# EAGLE board ME433Schematic (EAGLE 7.5.0)
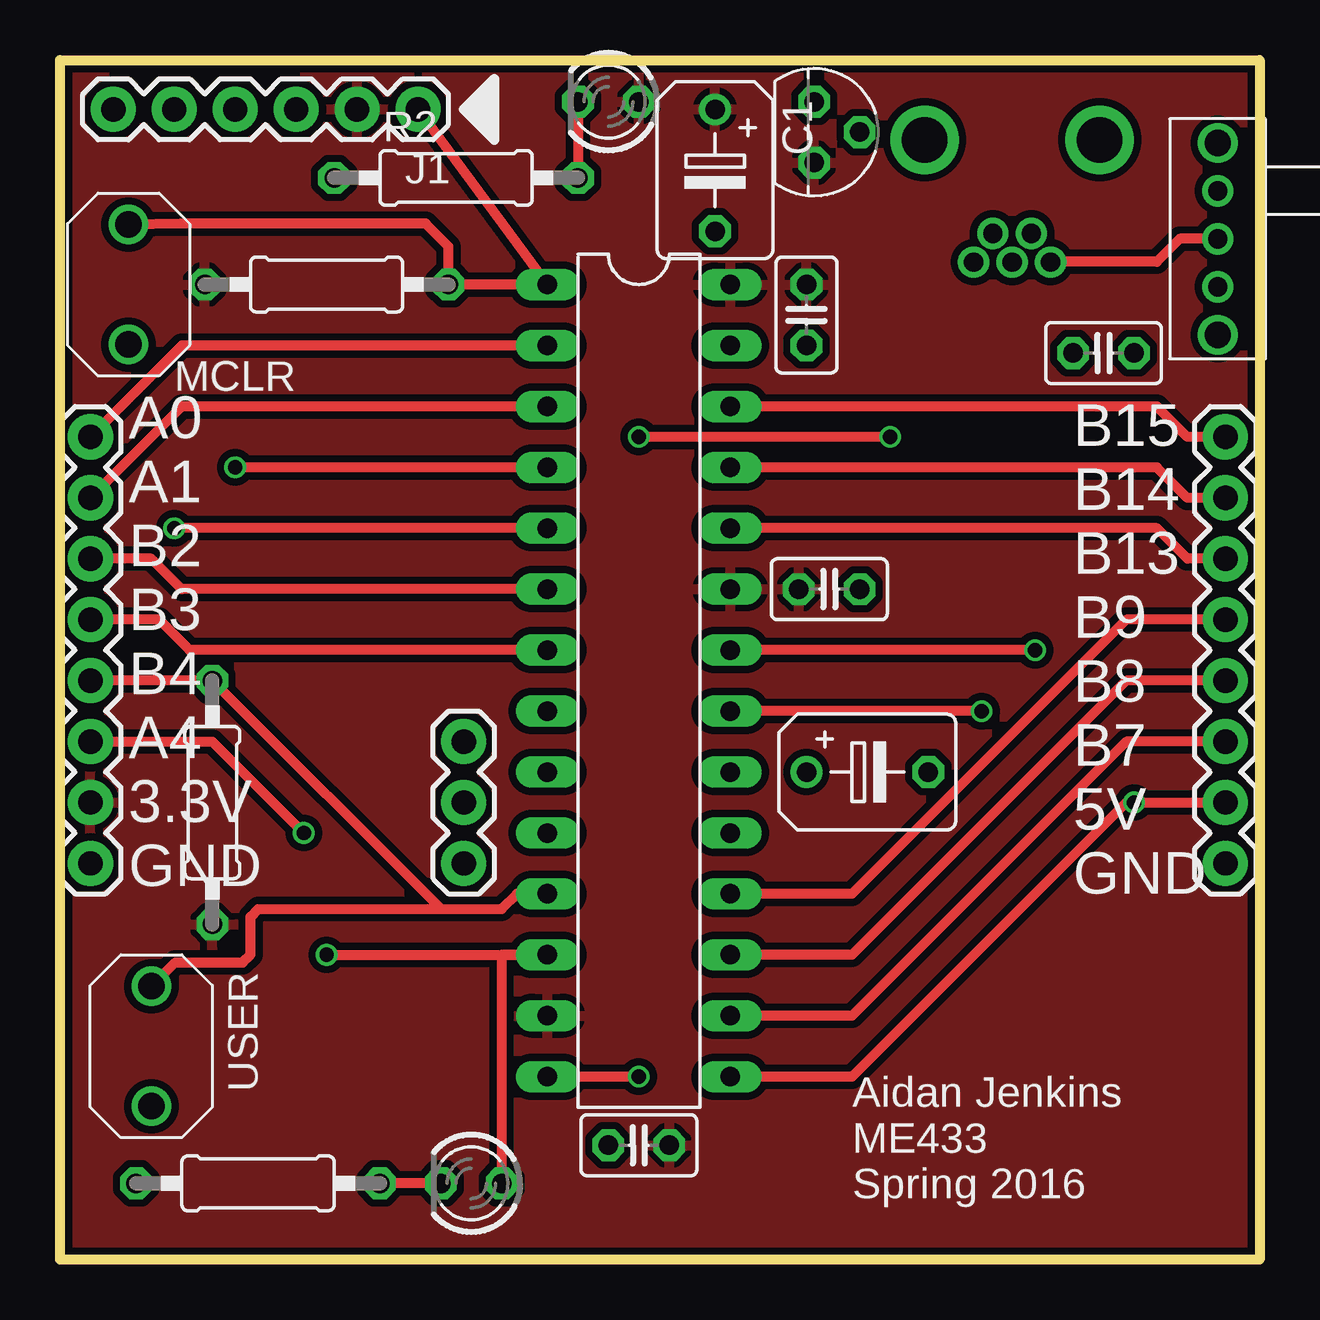
[diagram p0: board, top side]
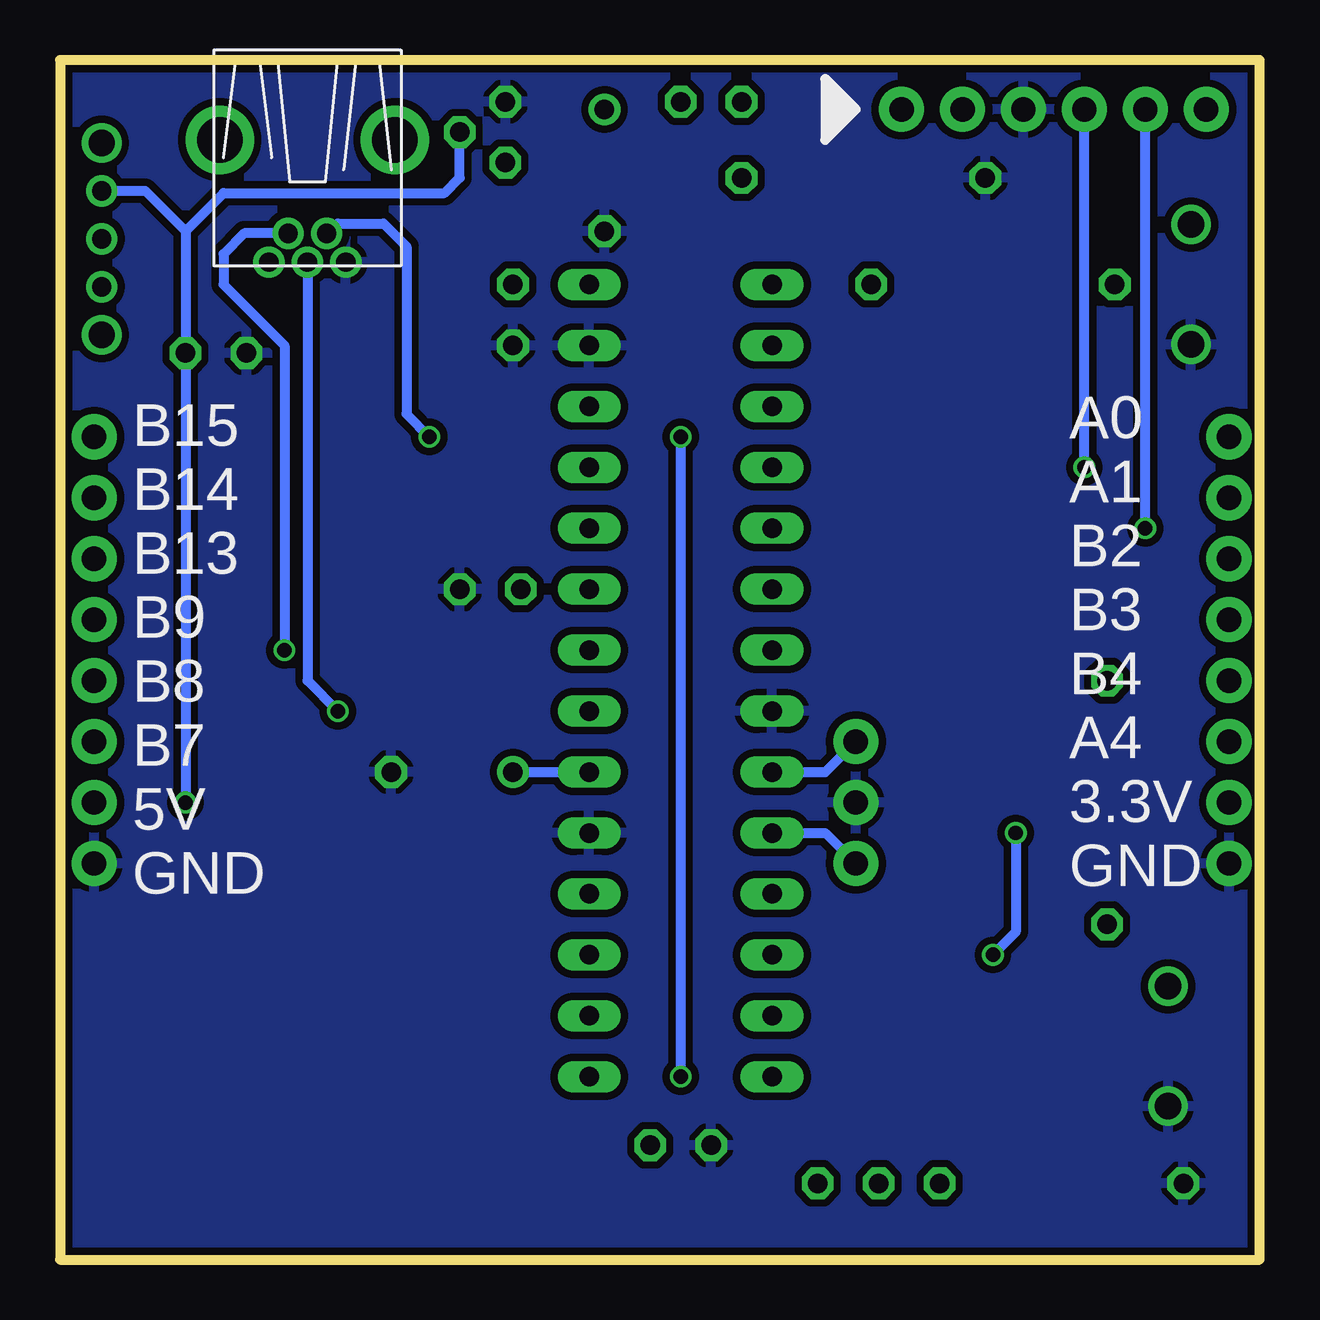
[diagram p1: board, bottom side, seen from below]

Size 50 x 50 mm. Coordinates in mm from the lower left corner, seen from the top.
Outline: 0,0 0,50 50,50 50,0 0,0
Copper layers (1*16): Top 0.035mm / dielectric 1.5mm / Bottom 0.035mm
Design rules "SeeedStudio_2layer_DRU_no_angle_20140221": minimum track width 6mil, minimum drill 12mil, track to track 6mil, track to pad 6mil, pad to pad 6mil, via to via 6mil, smd to smd 0mil, copper to edge 10mil, drill to drill 10mil, minimum pad ring 10mil, minimum via ring 6mil, stop-mask expansion 2mil, vias tented up to drill 100mil, thermal gap 10mil

## Footprints (pad centres in the part's own frame; a part is rotated, then mirrored left to right if it is on the bottom)
B45181B = drill 0.813: + -2.54,0 | drill 0.813 octagon: - 2.54,0
C025-025X050 = drill 0.813 octagon: 1 -1.27,0; 2 1.27,0
1X06 = drill 1.016 pad 1.88: 1 0,0; 2 2.54,0; 3 5.08,0; 4 7.62,0; 5 10.16,0; 6 12.7,0
1X08_ROUND = drill 1.016 pad 1.88: 1 0,0; 2 2.54,0; 3 5.08,0; 4 7.62,0; 5 10.16,0; 6 12.7,0; 7 15.24,0; 8 17.78,0
LED3MM = drill 0.813 octagon: A -1.27,0; K 1.27,0
0207/10 = drill 0.813 octagon: 1 -5.08,0; 2 5.08,0
DIL28-3 = drill 0.813 long: 1 -16.51,-3.81; 2 -13.97,-3.81; 3 -11.43,-3.81; 4 -8.89,-3.81; 5 -6.35,-3.81; 6 -3.81,-3.81; 7 -1.27,-3.81; 8 1.27,-3.81; 9 3.81,-3.81; 10 6.35,-3.81; 11 8.89,-3.81; 12 11.43,-3.81; 13 13.97,-3.81; 14 16.51,-3.81; 15 16.51,3.81; 16 13.97,3.81; 17 11.43,3.81; 18 8.89,3.81; 19 6.35,3.81; 20 3.81,3.81; 21 1.27,3.81; 22 -1.27,3.81; 23 -3.81,3.81; 24 -6.35,3.81; 25 -8.89,3.81; 26 -11.43,3.81; 27 -13.97,3.81; 28 -16.51,3.81
1X03 = drill 1.016 pad 1.88: 1 0,0; 2 2.54,0; 3 5.08,0
SWITCH = drill 1.1: P$1 -2.5,0; P$2 2.5,0
USB-MB-H = drill 0.8: D+ 5.1,0; D- 3.9,0.8; GND 5.1,-1.6; ID 3.9,-0.8; VBUS 5.1,1.6 | drill 1.9: P$6 0,-3.65; P$7 0,3.65
TO92 = drill 0.813 octagon: 1.GND -1.27,0; 2.VIN 0,1.905; 3.VOUT 1.27,0
SPDTSLIDE = drill 0.8: 1.OUT -2,0; 2.OUT 2,0; 3.COMMON 0,0 | drill 1.1: P$4 -4,0; P$5 4,0

## Placement (x,y rotation side)
C1  10uF  [B45181B]  27.3,45.4 270 top
C2  10uF  [B45181B]  33.66,20.32 0 top
C3  0.1uF  [C025-025X050]  24.13,4.76 180 top
C4  0.1uF  [C025-025X050]  31.11,39.37 270 top
C5  0.1uF  [C025-025X050]  32.07,27.94 0 top
C6  0.1uF  [C025-025X050]  43.5,37.78 180 top
J1  [1X06]  14.92,47.94 180 top
J2  [1X08_ROUND]  1.27,16.51 90 top
J3  [1X08_ROUND]  48.58,16.51 90 top
LED1  RED  [LED3MM]  22.86,48.26 180 top
LED2  GREEN  [LED3MM]  17.14,3.17 180 top
R1  10K  [0207/10]  11.11,40.64 0 top
R2  330  [0207/10]  16.51,45.09 0 top
R3  10K  [0207/10]  6.35,19.05 90 top
R4  330  [0207/10]  8.26,3.17 0 top
U$1  PIC32MX250F128B  [DIL28-3]  24.13,24.13 270 top
U$2  8MHZRESONATOR  [1X03]  16.83,16.51 90 top
U$3  MCLR  [SWITCH]  2.86,40.64 270 top
U$8  PUSHSWITCH  [SWITCH]  3.81,8.89 270 top
U$12  USBMINIB  [USB-MB-H]  39.69,46.67 270 top
U$13  MCP1702TO  [TO92]  31.43,46.99 270 top
U$18  SLIDESWITCH  [SPDTSLIDE]  48.26,42.55 270 top

## Library data of the parts
C1-C6 LED1 LED2 R1-R4 U$1-U$3 U$8 U$12 U$13 U$18 = ME433Library
J1-J3 = ME433Library; PROD_ID: CONN-08437

## Nets
+3V3: C1.+ C3.1 C4.1 C5.1 J1.2 J2.2 LED1.A R1.1 R3.1 U$1.13 U$1.23 U$1.28 U$13.3.VOUT
+5V: C6.1 J3.2 U$1.15 U$13.2.VIN U$18.1.OUT
A0: J2.8 U$1.2
A1: J2.7 U$1.3
A4: J2.3 LED2.A U$1.12
B2: J2.6 U$1.6
B3: J2.5 U$1.7
B4: J2.4 R3.2 U$1.11 U$8.P$1
B7: J3.3 U$1.16
B8: J3.4 U$1.17
B9: J3.5 U$1.18
B13: J3.6 U$1.24
B14: J3.7 U$1.25
B15: J3.8 U$1.26
D+: U$1.21 U$12.D+
D-: U$1.22 U$12.D-
GND: C1.- C2.- C3.2 C4.2 C5.2 C6.2 J1.3 J2.1 J3.1 R2.1 R4.1 U$1.8 U$1.19 U$1.27 U$2.2 U$3.P$2 U$8.P$2 U$12.GND U$13.1.GND
ID: U$1.14 U$12.ID
MCLR: J1.1 R1.2 U$1.1 U$3.P$1
N$1: U$12.VBUS U$18.3.COMMON
N$2: U$1.9 U$2.3
N$3: U$1.10 U$2.1
N$6: C2.+ U$1.20
N$7: LED2.K R4.2
N$11: LED1.K R2.2
PEGC1: J1.5 U$1.5
PEGD1: J1.4 U$1.4

## Tracks (layer width: path | path; a pad name or v marks a point on that pad's centre or on a via)
+3V3
  pour Top (isolate 0.305): -5.08,-2.54 -5.08,58.42 58.42,58.42 58.42,-2.54
+5V  (via drill 0.6)
  Top 0.406: J3.2 v44.77,19.05 44.45,19.05 33.02,7.62 U$1.15
  Bottom 0.406: U$18.1.OUT 46.45,44.55 44.77,42.86 | 44.77,42.86 C6.1 v44.77,19.05 | 44.77,42.86 43.18,44.45 33.97,44.45 33.34,45.09 U$13.2.VIN
A0
  Top 0.406: U$1.2 5.08,38.1 J2.8
A1
  Top 0.406: U$1.3 5.08,35.56 J2.7
A4  (via drill 0.6)
  Top 0.406: LED2.A 18.41,12.7 U$1.12 v11.11,12.7 | J2.3 6.35,21.59 v10.16,17.78
  Bottom 0.406: v10.16,17.78 10.16,13.65 v11.11,12.7
B2
  Top 0.406: U$1.6 5.08,27.94 3.81,29.21 J2.6
B3
  Top 0.406: U$1.7 5.4,25.4 4.13,26.67 J2.5
B4
  Top 0.406: J2.4 R3.2 15.88,14.61 | 15.88,14.61 18.41,14.61 19.05,15.24 U$1.11 | U$8.P$1 4.8,12.38 7.62,12.38 7.94,12.7 7.94,14.29 8.26,14.61 15.88,14.61
B7
  Top 0.406: J3.3 44.45,21.59 33.02,10.16 U$1.16
B8
  Top 0.406: J3.4 44.45,24.13 33.02,12.7 U$1.17
B9
  Top 0.406: J3.5 44.45,26.67 33.02,15.24 U$1.18
B13
  Top 0.406: J3.6 46.99,29.21 45.72,30.48 U$1.24
B14
  Top 0.406: J3.7 46.99,31.75 45.72,33.02 U$1.25
B15
  Top 0.406: J3.8 46.99,34.29 45.72,35.56 U$1.26
D+  (via drill 0.6)
  Top 0.406: v38.42,22.86 U$1.21
  Bottom 0.406: U$12.D+ 39.69,24.13 v38.42,22.86
D-  (via drill 0.6)
  Top 0.406: v40.64,25.4 U$1.22
  Bottom 0.406: U$12.D- 42.32,42.77 43.18,41.91 43.18,40.64 40.64,38.1 v40.64,25.4
GND
  pour Bottom (isolate 0.305): -5.08,-2.54 -5.08,55.88 53.34,55.88 53.34,-5.08 -5.08,-5.08
ID  (via drill 0.6)
  Top 0.406: v34.61,34.29 v24.13,34.29 | v24.13,7.62 U$1.14
  Bottom 0.406: U$12.ID 38.83,42.77 38.42,43.18 36.51,43.18 35.56,42.23 35.56,35.24 v34.61,34.29 | v24.13,34.29 v24.13,7.62
MCLR
  Top 0.406: J1.1 U$1.1 R1.2 16.19,42.23 15.24,43.18 5.04,43.18 U$3.P$1
N$1
  Top 0.406: U$18.3.COMMON 46.67,42.55 45.72,41.59 41.31,41.59 U$12.VBUS
N$2
  Bottom 0.406: U$1.9 18.1,20.32 U$2.3
N$3
  Bottom 0.406: U$1.10 18.1,17.78 U$2.1
N$6
  Bottom 0.406: C2.+ U$1.20
N$7
  Top 0.406: LED2.K R4.2
N$11
  Top 0.406: LED1.K R2.2
PEGC1  (via drill 0.6)
  Top 0.406: U$1.5 v4.76,30.48
  Bottom 0.406: v4.76,30.48 J1.5
PEGD1  (via drill 0.6)
  Top 0.406: U$1.4 v7.3,33.02
  Bottom 0.406: v7.3,33.02 J1.4

## Text on the board
tPlace: MCLR | A0 / A1 / B2 / B3 / B4 / A4 / 3.3V / GND | B15 / B14 / B13 / B9 / B8 / B7 / 5V / GND | USER | Aidan Jenkins / ME433 / Spring 2016
bPlace: A0 / A1 / B2 / B3 / B4 / A4 / 3.3V / GND | B15 / B14 / B13 / B9 / B8 / B7 / 5V / GND